# Allegro board SATROT-2-POWERBOARD-4.brd
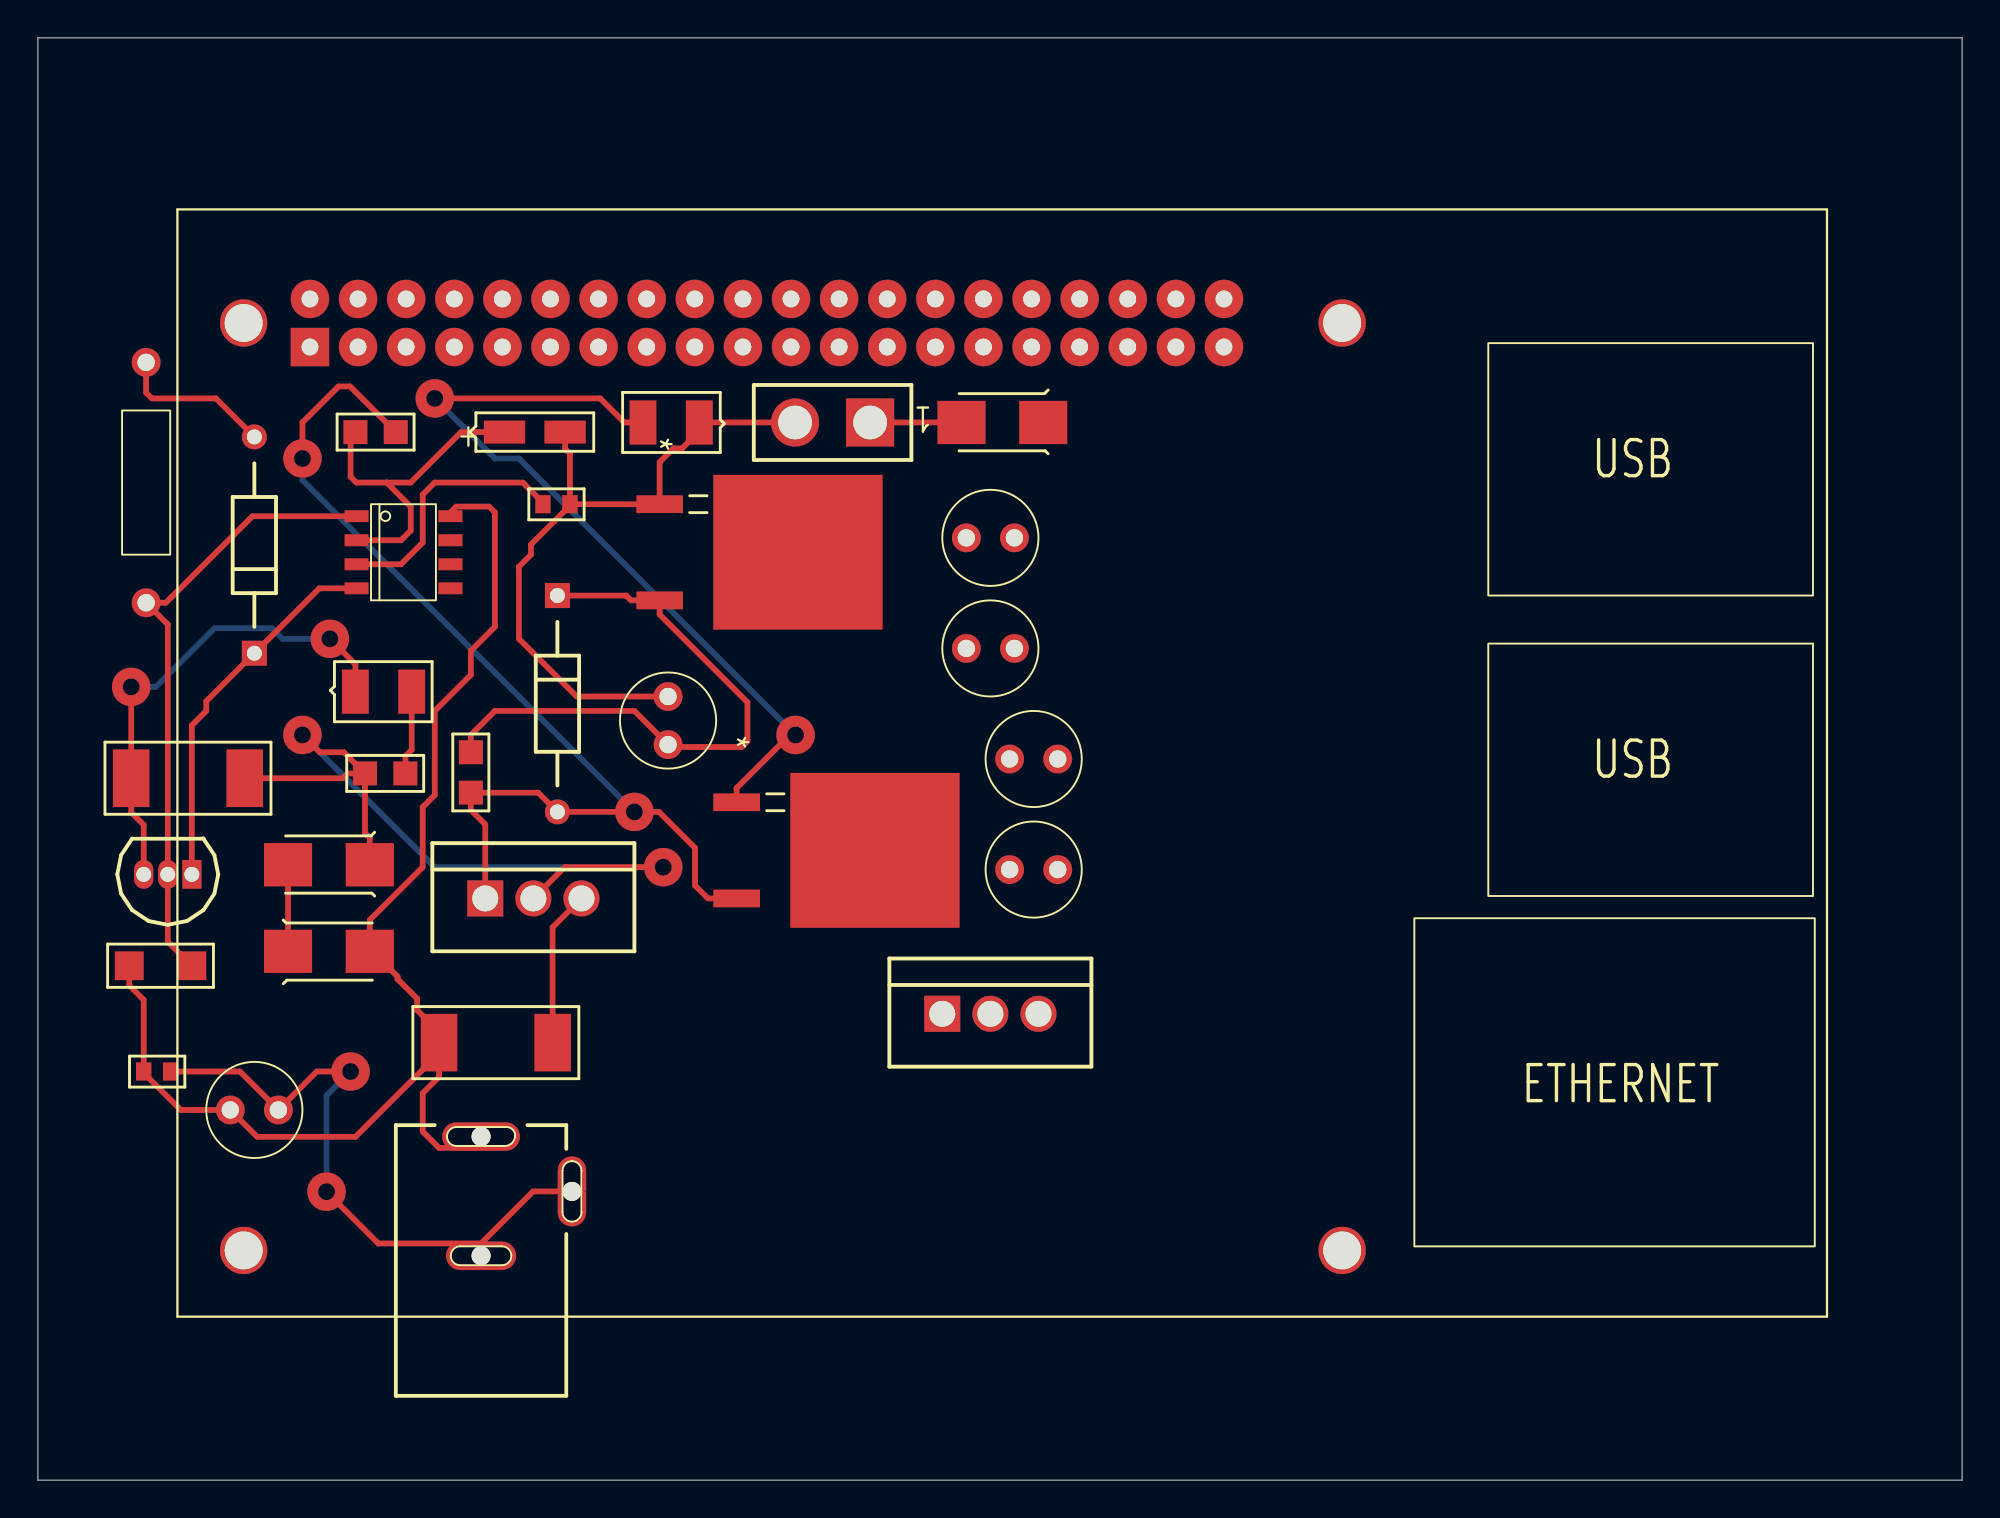
[diagram p0: board, top side]
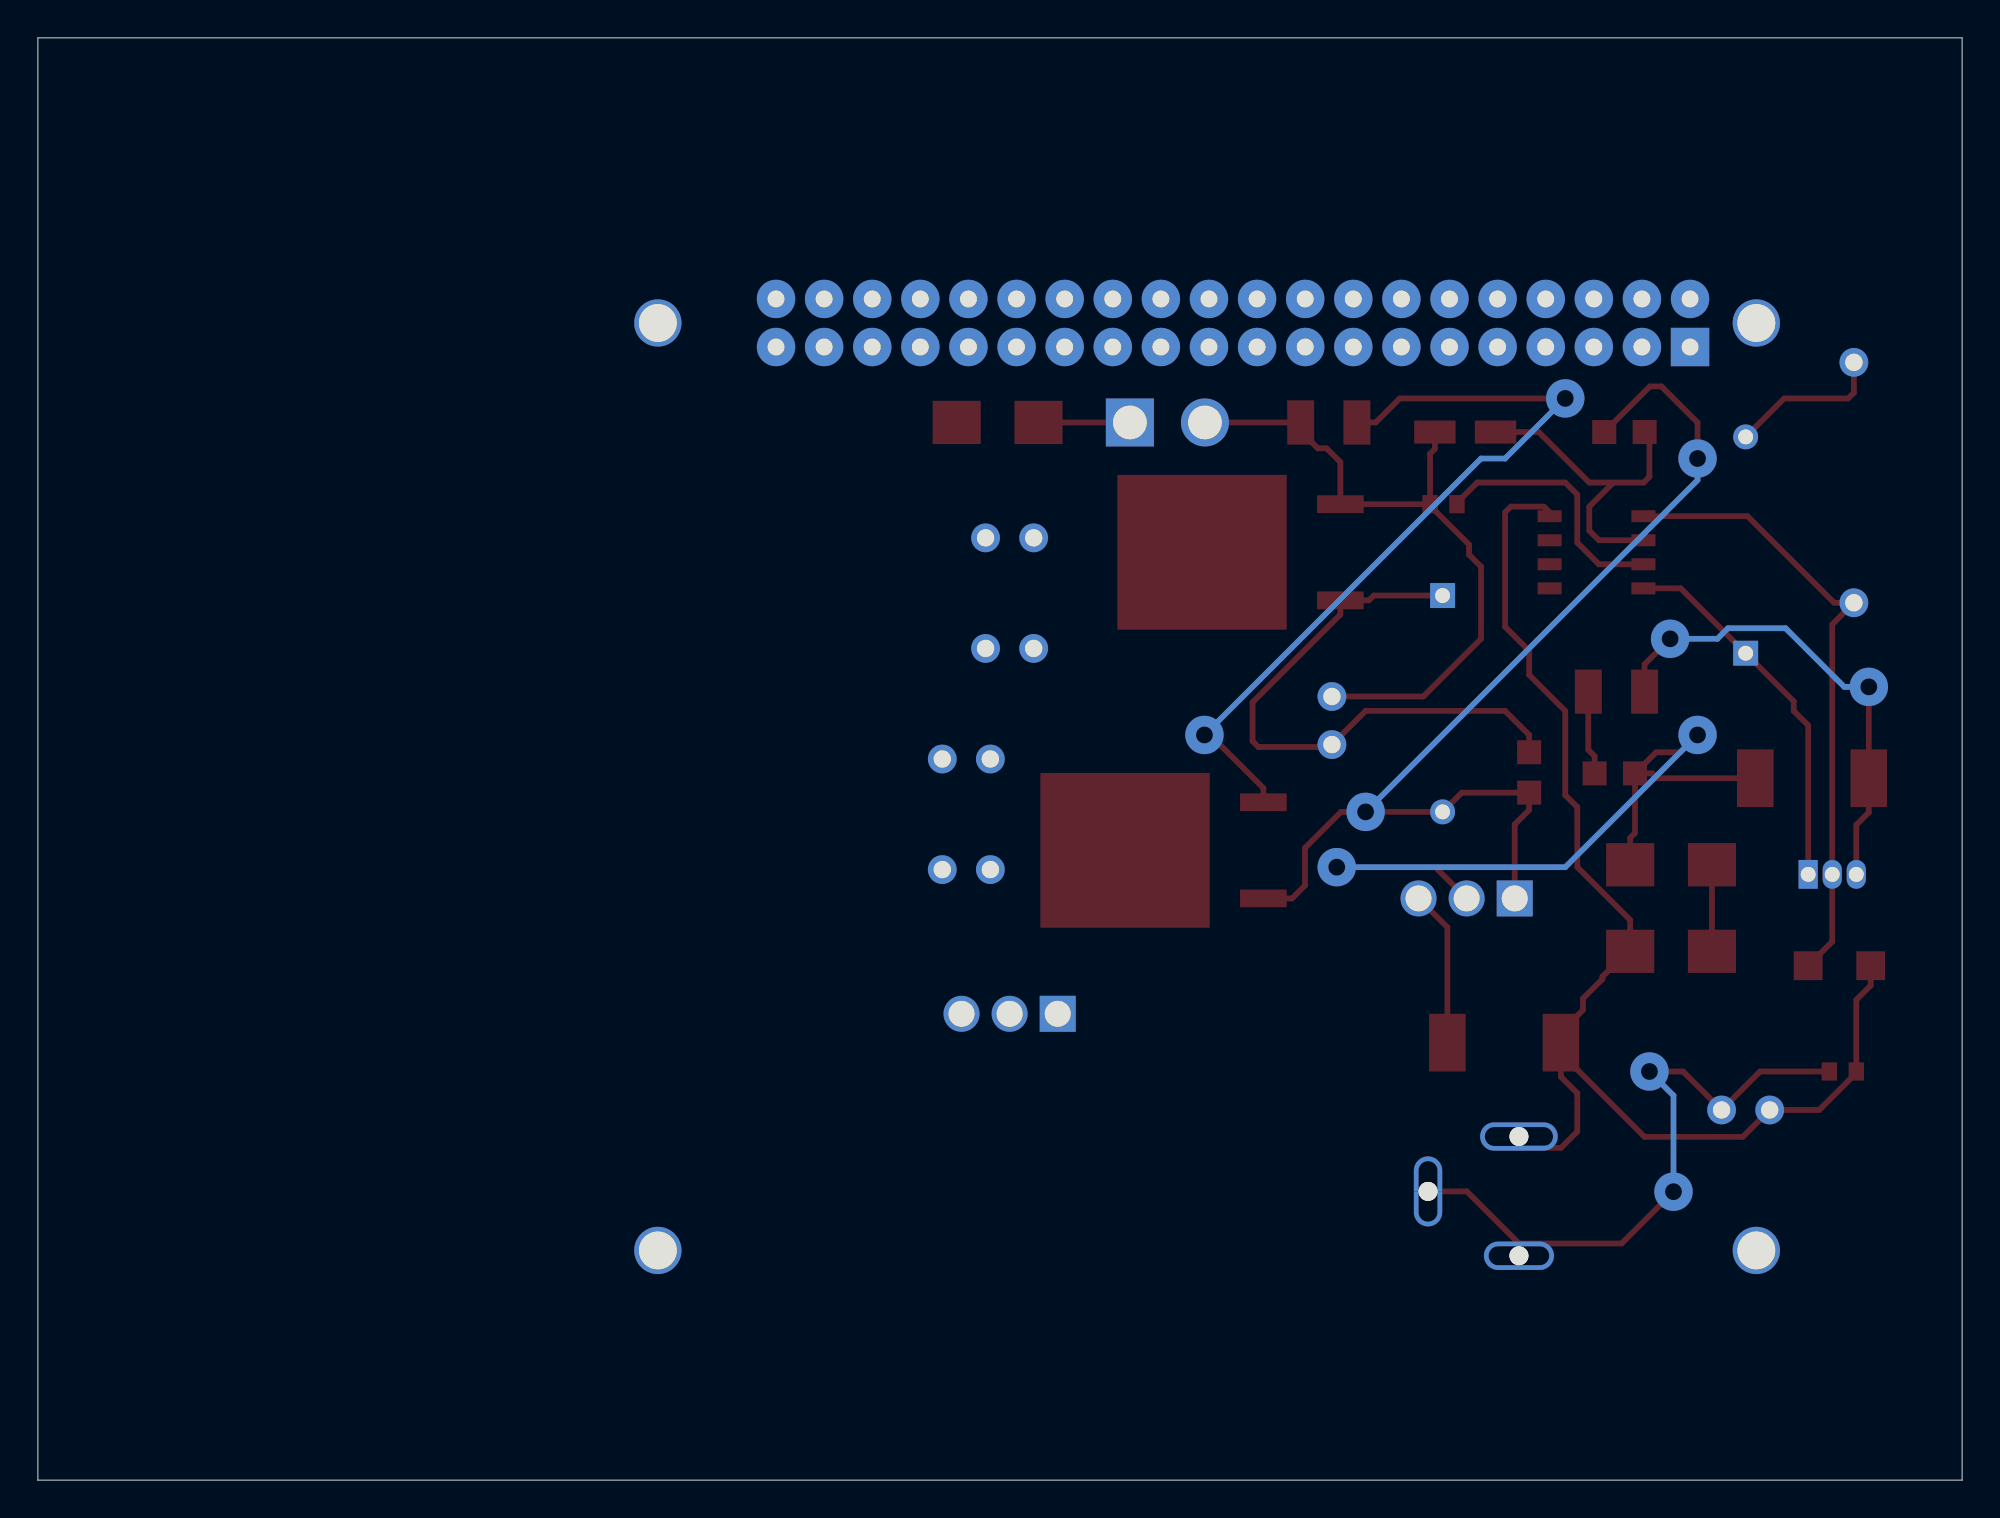
[diagram p1: board, bottom side, seen from below]

Outline 101.6 x 76.2 mm; copper layers: TOP, BOTTOM. Coordinates in mm from the lower left corner of the outline.
Outline path: 0,76.2 101.6,76.2 101.6,0 0,0 0,76.2

## Design rules (mm)
constraint set DEFAULT: min track width 0.305

## Placement (name value [footprint] x y rotation side)
C14  1000uF, 25V  [CAP196]  10.16 19.56 270 top
C15  0.1 uF  [SMC0603]  5.59 21.59 0 top
C16  0.1 uF  [SMC0603]  26.67 51.56 0 top
C17  1uF, 50V  [SMCT321612]  24.64 55.37 0 top
C18  1000uF, 25V  [CAP196]  33.27 38.86 0 top
C19  4700uF, 35V  [CAP196]  51.56 49.78 90 top
C20  4700uF, 35V  [CAP196]  51.56 43.94 90 top
C21  4700uF, 35V  [CAP196]  53.85 38.1 90 top
C22  4700uF, 35V  [CAP196]  53.85 32.26 90 top
D1  1N4007  [SMDO214AC12]  17.53 32.51 180 top
D2  1N4007  [SMDO214AC12]  13.21 27.94 0 top
D3  LED red  [SMD120612]  16.76 41.66 0 top
D4  1N4148  [DAX1DO204AH]  11.43 43.69 90 top
D5  1N4148  [DAX1DO204AH]  27.43 46.74 270 top
D6  LED green  [SMD120612]  34.92 55.88 180 top
D8  1N4007  [SMDO214AC12]  53.09 55.88 180 top
J11  To batteries  [BLKCON156VHTM1SQSW1562]  43.94 55.88 180 top
J16  DCJ200-10-A-XX-X_REVA  [GCT_DCJ200-10-A-XX-X_REVA]  25.4 14.61 0 top
Q1  BC327  [TO92]  8.13 32 180 top
Q3  MJE2955  [TO220AB]  23.62 30.73 0 top
Q4  3055T  [TO220AB]  47.75 24.64 0 top
R26  10K  [SMR1206]  4.83 27.18 0 top
R27  1M  [RES500]  5.71 59.05 0 top
R28  470  [SMR0805]  17.27 37.34 0 top
R29  150, 2W  [SMR2512]  10.92 37.08 180 top
R30  100K  [SMR0805]  22.86 36.32 90 top
R31  1K  [BO_PWR163]  40.13 49.02 270 top
R32  100K  [SMR0805]  16.76 55.37 0 top
R33  1K  [BO_PWR163]  44.2 33.27 270 top
R34  1, 2W  [SMR2512]  27.18 23.11 180 top
U4  TL072  [SOIC8]  19.3 49.02 0 top
U9  Raspberry Pi B+  [GU-RASP-PI-3]  7.37 8.64 0 top

## Library data of the parts
C14 C18-C22 = CAP POL: Tolerance: ***; User Part Number: ***
C15 C16 = CAP NP
C17 = CAP POL
D1 D2 D4 D5 D8 = DIODE
D3 D6 = LED
J11 = CON2
J16 = DCJ200-10-A-XX-X_REVA
Q1 Q3 = BC327
Q4 = BC337
R26 R28-R30 R32 R34 = R
R27 = R: Tolerance: ***; User Part Number: ***
R31 R33 = PWR163S-25-15R0F: User Part Number: PN; Tolerance: TOL
U4 = TL072: Tolerance: ***; User Part Number: ***
U9 = Raspberry Pi B+

## Footprints (pads in the part's own frame, mm; a bottom-side part is the same pattern mirrored in y, then rotated)
BLKCON156VHTM1SQSW1562
  rect 2.54x2.54 hole 1.778: 1(0,0)
  round 2.54 hole 1.778: 2(3.962,0)
BO_PWR163
  rect 0.94x2.464 smd: 1(-2.54,-7.303) 2(2.54,-7.303)
  rect 8.179x8.941 smd: 3(0,0)
CAP196
  round 1.524 hole 0.914: 1(0,0) 2(0,2.54)
DAX1DO204AH
  rect 1.321x1.321 hole 0.787: 1(0,0)
  round 1.321 hole 0.787: 2(11.43,0)
GCT_DCJ200-10-A-XX-X_REVA
  round 1 hole 1 unplated: (-2,3.55) (-2,-2.75) (2.8,0.65)
  rect 0.1x0.1 smd: 1(-2,2.95) 2(-2,-2.1) 3(2.2,0.65)
GU-RASP-PI-3
  round 2.5 hole 2 unplated: (3.5,52.5) (3.5,3.5) (61.5,52.5) (61.5,3.5)
  rect 2.032x2.032 hole 0.889: 1(7,51.23)
  round 2.032 hole 0.889: 2(7,53.77) 3(9.54,51.23) 4(9.54,53.77) 5(12.08,51.23) 6(12.08,53.77) 7(14.62,51.23) 8(14.62,53.77) 9(17.16,51.23) 10(17.16,53.77) 11(19.7,51.23) 12(19.7,53.77) 13(22.24,51.23) 14(22.24,53.77) 15(24.78,51.23) 16(24.78,53.77) 17(27.32,51.23) 18(27.32,53.77) 19(29.86,51.23) 20(29.86,53.77) 21(32.4,51.23) 22(32.4,53.77) 23(34.94,51.23) 24(34.94,53.77) 25(37.48,51.23) 26(37.48,53.77) 27(40.02,51.23) 28(40.02,53.77) 29(42.56,51.23) 30(42.56,53.77) 31(45.1,51.23) 32(45.1,53.77) 33(47.64,51.23) 34(47.64,53.77) 35(50.18,51.23) 36(50.18,53.77) 37(52.72,51.23) 38(52.72,53.77) 39(55.26,51.23) 40(55.26,53.77)
RES500
  round 1.524 hole 0.914: 1(0,-12.7) 2(0,0)
SMC0603
  rect 0.813x0.965 smd: 1(0,0) 2(1.422,0)
SMCT321612
  rect 2.184x1.219 smd: 1(0,0) 2(3.2,0)
SMD120612
  rect 1.422x2.337 smd: 1(0,0) 2(2.972,0)
SMDO214AC12
  rect 2.54x2.286 smd: 1(0,0) 2(4.318,0)
SMR0805
  rect 1.27x1.27 smd: 1(0,0) 2(2.134,0)
SMR1206
  rect 1.524x1.524 smd: 1(0,0) 2(3.302,0)
SMR2512
  rect 1.93x3.048 smd: 1(0,0) 2(5.994,0)
SOIC8
  rect 1.27x0.635 smd: 1(-2.477,1.905) 2(-2.477,0.635) 3(-2.477,-0.635) 4(-2.477,-1.905) 5(2.477,-1.905) 6(2.477,-0.635) 7(2.477,0.635) 8(2.477,1.905)
TO92
  rect 1.016x1.524 hole 0.787: 1(0,0)
  oval 1.016x1.524 hole 0.787: 2(1.27,0) 3(2.54,0)
TO220AB
  rect 1.905x1.905 hole 1.372: 1(0,0)
  round 1.905 hole 1.372: 2(2.54,0) 3(5.08,0)

## Nets
GND1: U9.6
GND3: U9.14
GND4: U9.20
GND5: U9.25
GND6: U9.30
GND7: U9.34
GND8: U9.39
GND_POWER: C14.2 C15.2 C16.1 C16.2 C17.2 C18.2 C19.2 C20.2 C21.2 C22.2 D4.1(K) D6.1(CATHODE) J11.2 J16.2 J16.3 Q1.1 R31.1 U4.3 U4.4
P3V3: U9.1 U9.17
P5V: U9.2 U9.4(P5V#4)
N12978: C14.1 C15.1 D2.2 J16.1 R26.1 R34.2 U4.8
N13089: D1.2 D2.1(K)
N13093: D1.1(K) Q3.2 R28.1 R29.1
N13141: D3.1(CATHODE) Q1.3(EMITTER) R29.2
N13166: Q1.2 R26.2 R27.1 U4.1
N13277: C18.1 D5.1(K) R30.2 R31.2
N13315: D5.2 Q3.1 R30.1 R32.2 R33.2
N13493: C17.1 R32.1 U4.2
N13497: D6.2 R33.1
N14154: D8.2 J11.1
N14459: C19.1 C20.1 C21.1 C22.1 D8.1(K) Q4.3
N14998: Q4.1(EMITTER)
N15485: Q4.2
N360181: D4.2 R27.2
N362820: D3.2 R28.2
N366460: Q3.3(EMITTER) R34.1

Pads without a net: R31 3; R33 3; U4 5 6 7; U9 3 5 7 8 9 10 11 12 13 15 16 18 19 21 22 23 24 26 27 28 29 31 32 33 35 36 37 38 40

## Via types
v1: diameter 2.032, hole 0.889, TOP to BOTTOM, 10 vias

## Routing (per net, layer and track width the routed paths; a pad name or vN(x,y) marks a point on that pad's centre or on a via; arc(x,y) is an arc through that point)
GND_POWER: length 102.7
  TOP w0.305: J16.3 26.15,15.25 J16.2 17.98,12.5 v1(15.24,15.24) ; v1(16.51,21.59) 14.73,21.59 C14.2 10.67,21.59 C15.2 ; U4.3 19.18,48.39 20.32,49.53 20.32,52.07 20.95,52.7 25.6,52.7 26.67,51.64 C16.1 ; C18.2 28.45,41.4 25.4,44.45 25.4,48.26 26.04,48.9 26.04,49.43 28.09,51.49 C16.2 ; C16.2 28.09,54.23 27.84,54.48 C17.2 ; C16.2 R31.1 32.83,53.78 33.56,54.51 34.02,54.51 34.92,55.42 D6.1 J11.2 ; Q1.1 8.13,39.88 8.89,40.64 8.89,41.15 D4.1 14.86,47.12 U4.4
  BOTTOM w0.305: v1(15.24,15.24) 15.24,20.32 v1(16.51,21.59)
N12978: length 68.4
  TOP w0.305: U4.8 21.78,51.13 22.09,51.44 23.83,51.44 24.13,51.13 24.13,45.09 22.86,43.81 22.86,42.55 20.95,40.64 20.95,36.2 20.32,35.56 20.32,32.39 17.53,29.6 D2.2 17.65,27.94 18.99,26.6 18.99,26.47 20.02,25.45 20.02,24.84 21.18,23.67 R34.2 21.18,22.56 ; 21.18,22.56 21.18,21.31 20.32,20.45 20.32,18.41 21.18,17.55 J16.1 ; 21.18,22.56 16.76,18.14 11.58,18.14 C14.1 7.54,19.56 5.59,21.51 C15.1 5.59,25.37 4.83,26.14 R26.1
N13089: length 4.6
  TOP w0.305: D2.1 D1.2
N13093: length 45
  TOP w0.305: v1(13.97,39.37) 14.89,38.45 16.16,38.45 R28.1 ; R28.1 17.27,34.19 17.53,33.93 D1.1 ; R28.1 16.36,37.34 16.1,37.08 R29.1 ; Q3.2 27.81,32.38 v1(33.02,32.38)
  BOTTOM w0.305: v1(13.97,39.37) 20.95,32.38 v1(33.02,32.38)
N13141: length 25.5
  TOP w0.305: v1(4.93,41.91) R29.2 4.93,35.28 5.59,34.62 Q1.3 ; D3.1 16.76,43.1 v1(15.42,44.45)
  BOTTOM w0.305: v1(15.42,44.45) 12.92,44.45 12.36,45.01 9.32,45.01 6.22,41.91 v1(4.93,41.91)
N13166: length 33.2
  TOP w0.305: U4.1 11.33,50.93 6.76,46.35 R27.1 6.86,45.21 Q1.2 6.86,28.45 R26.2
N13277: length 31.8
  TOP w0.305: R30.2 22.86,39.37 24.13,40.64 31.5,40.64 C18.1 33.4,38.73 37.16,38.73 37.47,39.04 37.47,41.1 32.83,45.73 R31.2 31.32,46.48 31.06,46.74 D5.1
N13315: length 58
  TOP w0.305: Q3.1 23.62,34.65 22.86,35.41 R30.1 26.42,36.32 D5.2 v1(31.5,35.31) 32.79,35.31 34.7,33.4 34.7,31.42 35.38,30.73 R33.2 ; R32.2 16.48,57.78 15.88,57.78 13.97,55.88 v1(13.97,53.98)
  BOTTOM w0.305: v1(13.97,53.98) 13.97,52.83 v1(31.5,35.31)
N13493: length 18
  TOP w0.305: R32.1 16.51,55.12 16.51,53.01 16.81,52.7 18.41,52.7 ; U4.2 19.18,49.66 19.68,50.16 19.68,51.44 18.41,52.7 ; 18.41,52.7 19.68,52.7 22.35,55.37 C17.1
N13497: length 43
  TOP w0.305: v1(40.01,39.37) 39.7,39.37 36.89,36.56 R33.1 ; D6.2 30.96,55.88 29.69,57.15 v1(20.95,57.15)
  BOTTOM w0.305: v1(20.95,57.15) 24.13,53.98 25.4,53.98 v1(40.01,39.37)
N14154: length 4.8
  TOP w0.305: J11.1 D8.2
N360181: length 8.3
  TOP w0.305: D4.2 9.4,57.15 6.02,57.15 5.71,57.45 R27.2
N362820: length 4.5
  TOP w0.305: R28.2 19.41,38.25 19.74,38.58 D3.2
N366460: length 8.3
  TOP w0.305: Q3.3 27.18,29.21 R34.1

## Copper pours and planes (outline as drawn; the poured copper is in the pictures)
GND_POWER on TOP (solid shape): 23.4,12.36 22.3,12.36 21.95,12.21 21.8,11.85 21.95,11.5 22.3,11.36 23.4,11.36 23.4,11.1 22.3,11.1 21.77,11.32 21.55,11.85 21.77,12.39 22.3,12.61 23.4,12.61
GND_POWER on TOP (solid shape): 24.5,12.61 25.03,12.39 25.25,11.85 25.03,11.32 24.5,11.1 23.4,11.1 23.4,11.36 24.5,11.36 24.85,11.5 25,11.85 24.85,12.21 24.5,12.36 23.4,12.36 23.4,12.61
GND_POWER on TOP (solid shape): 27.7,14.15 27.85,13.8 28.2,13.66 28.55,13.8 28.7,14.15 28.7,15.25 28.95,15.25 28.95,14.15 28.73,13.62 28.2,13.41 27.67,13.62 27.45,14.15 27.45,15.25 27.7,15.25
GND_POWER on TOP (solid shape): 28.73,16.89 28.95,16.36 28.95,15.25 28.7,15.25 28.7,16.36 28.55,16.71 28.2,16.85 27.85,16.71 27.7,16.36 27.7,15.25 27.45,15.25 27.45,16.36 27.67,16.89 28.2,17.11
Net_2 on BOTTOM (solid shape): 23.4,12.36 22.3,12.36 21.95,12.21 21.8,11.85 21.95,11.5 22.3,11.36 23.4,11.36 23.4,11.1 22.3,11.1 21.77,11.32 21.55,11.85 21.77,12.39 22.3,12.61 23.4,12.61
Net_2 on BOTTOM (solid shape): 24.5,12.61 25.03,12.39 25.25,11.85 25.03,11.32 24.5,11.1 23.4,11.1 23.4,11.36 24.5,11.36 24.85,11.5 25,11.85 24.85,12.21 24.5,12.36 23.4,12.36 23.4,12.61
Net_3 on BOTTOM (solid shape): 27.7,14.15 27.85,13.8 28.2,13.66 28.55,13.8 28.7,14.15 28.7,15.25 28.95,15.25 28.95,14.15 28.73,13.62 28.2,13.41 27.67,13.62 27.45,14.15 27.45,15.25 27.7,15.25
Net_3 on BOTTOM (solid shape): 28.73,16.89 28.95,16.36 28.95,15.25 28.7,15.25 28.7,16.36 28.55,16.71 28.2,16.85 27.85,16.71 27.7,16.36 27.7,15.25 27.45,15.25 27.45,16.36 27.67,16.89 28.2,17.11
Net_4 on BOTTOM (solid shape): 23.4,18.66 22.1,18.66 21.75,18.51 21.6,18.15 21.75,17.8 22.1,17.66 23.4,17.66 23.4,17.41 22.1,17.41 21.57,17.62 21.35,18.15 21.57,18.69 22.1,18.9 23.4,18.9
Net_4 on BOTTOM (solid shape): 24.7,18.9 25.23,18.69 25.45,18.15 25.23,17.62 24.7,17.41 23.4,17.41 23.4,17.66 24.7,17.66 25.05,17.8 25.2,18.15 25.05,18.51 24.7,18.66 23.4,18.66 23.4,18.9
N12978 on TOP (solid shape): 23.4,18.66 22.1,18.66 21.75,18.51 21.6,18.15 21.75,17.8 22.1,17.66 23.4,17.66 23.4,17.41 22.1,17.41 21.57,17.62 21.35,18.15 21.57,18.69 22.1,18.9 23.4,18.9
N12978 on TOP (solid shape): 24.7,18.9 25.23,18.69 25.45,18.15 25.23,17.62 24.7,17.41 23.4,17.41 23.4,17.66 24.7,17.66 25.05,17.8 25.2,18.15 25.05,18.51 24.7,18.66 23.4,18.66 23.4,18.9
